# Altium PCB PCB1_Young.PcbDoc
Units mil, origin at the board's own origin, x right, y up, seen from the top; angles counter-clockwise.
Board outline 2800 x 2665 mil, 2 copper layers (Top Layer, Bottom Layer); 26 components, 20 nets, 104 pads, 0 vias.
Unrouted connection lines stored in the file: 9.
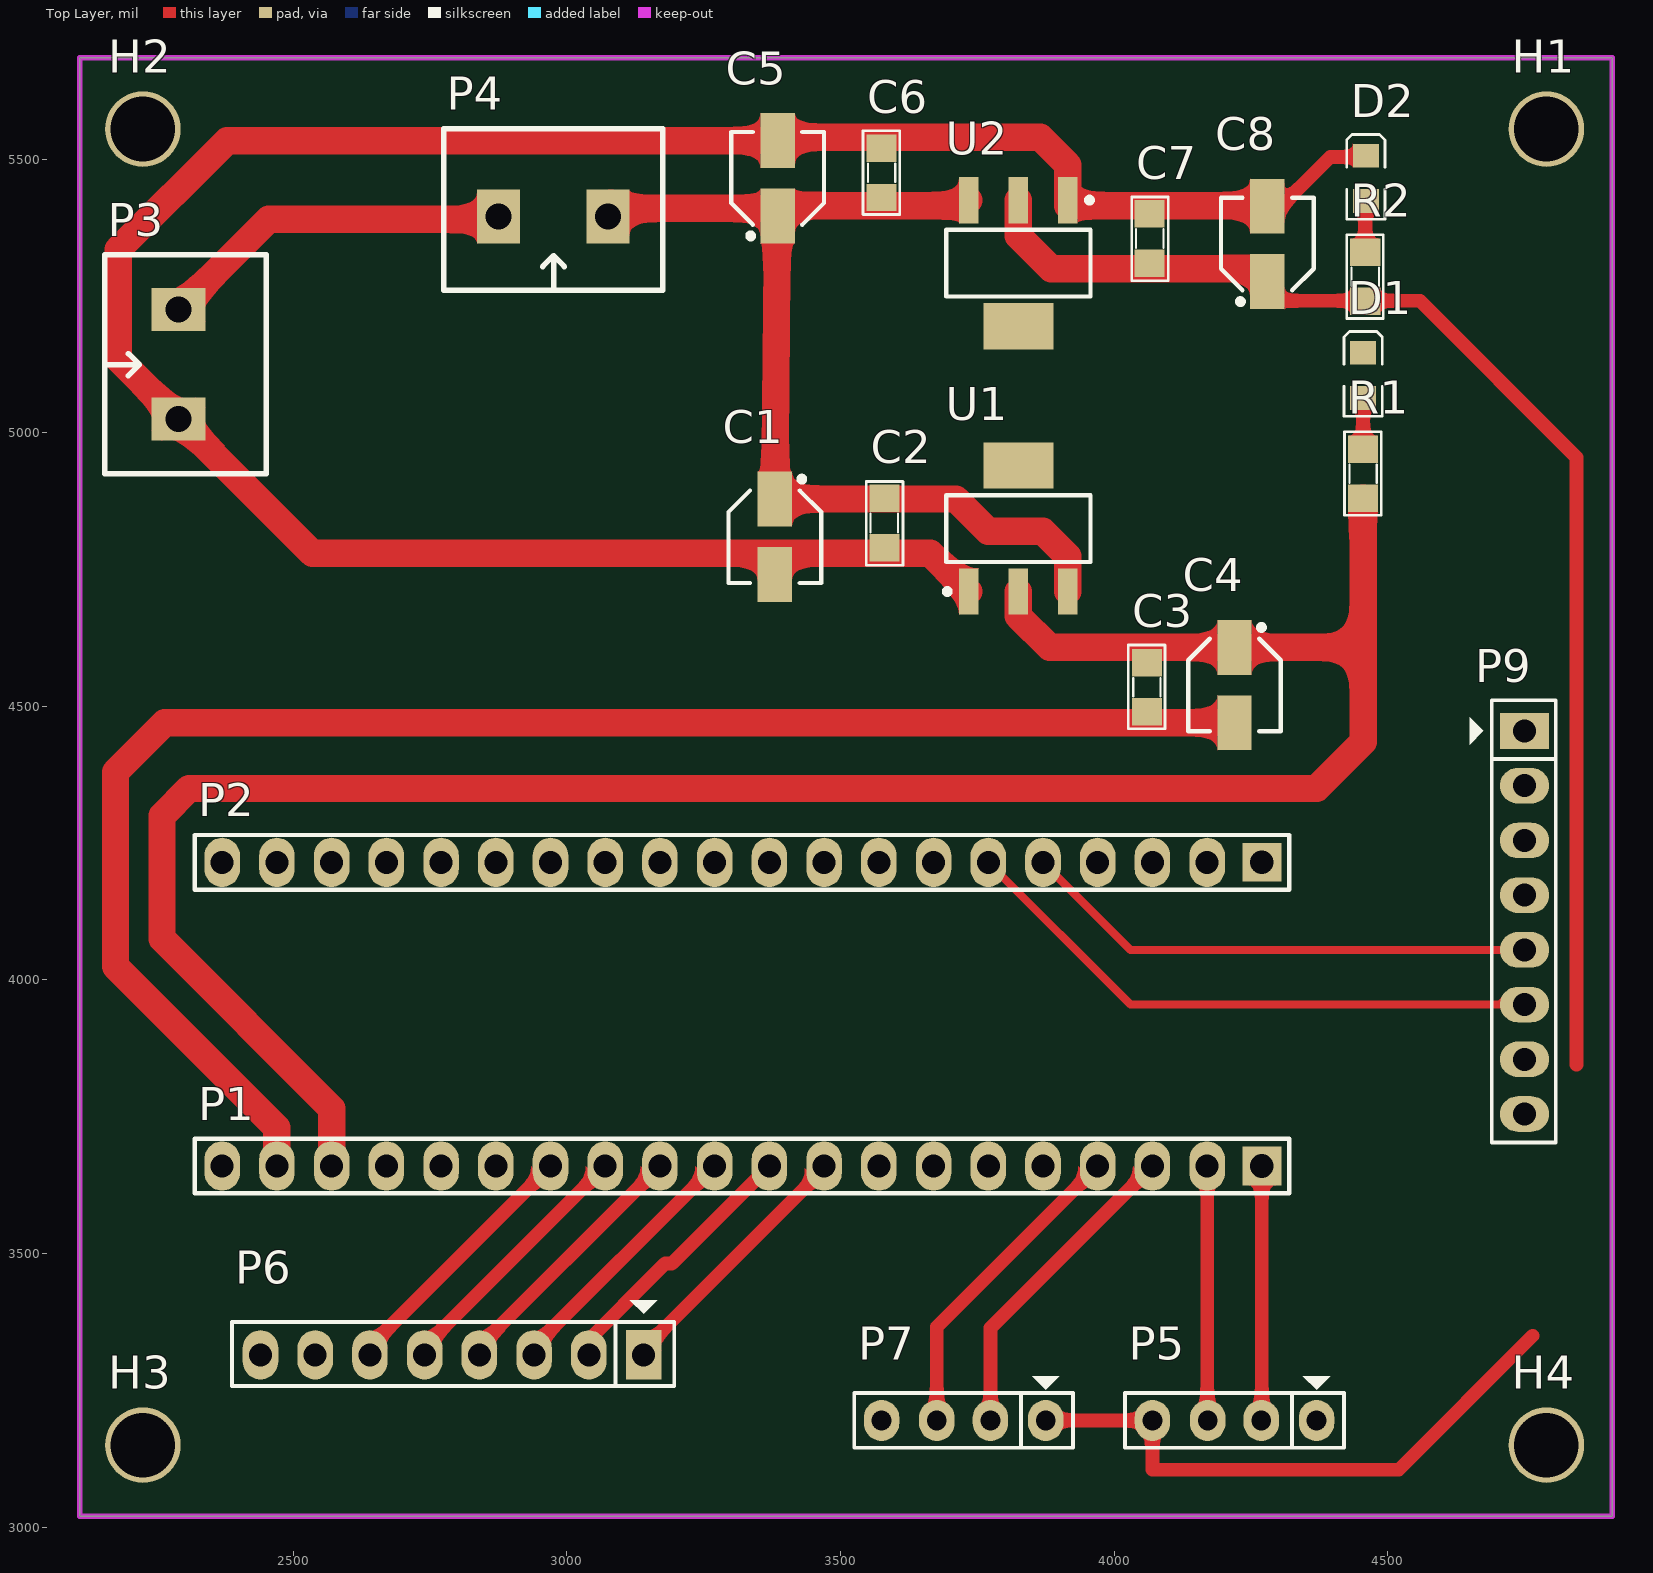
[diagram p0: Top Layer view]
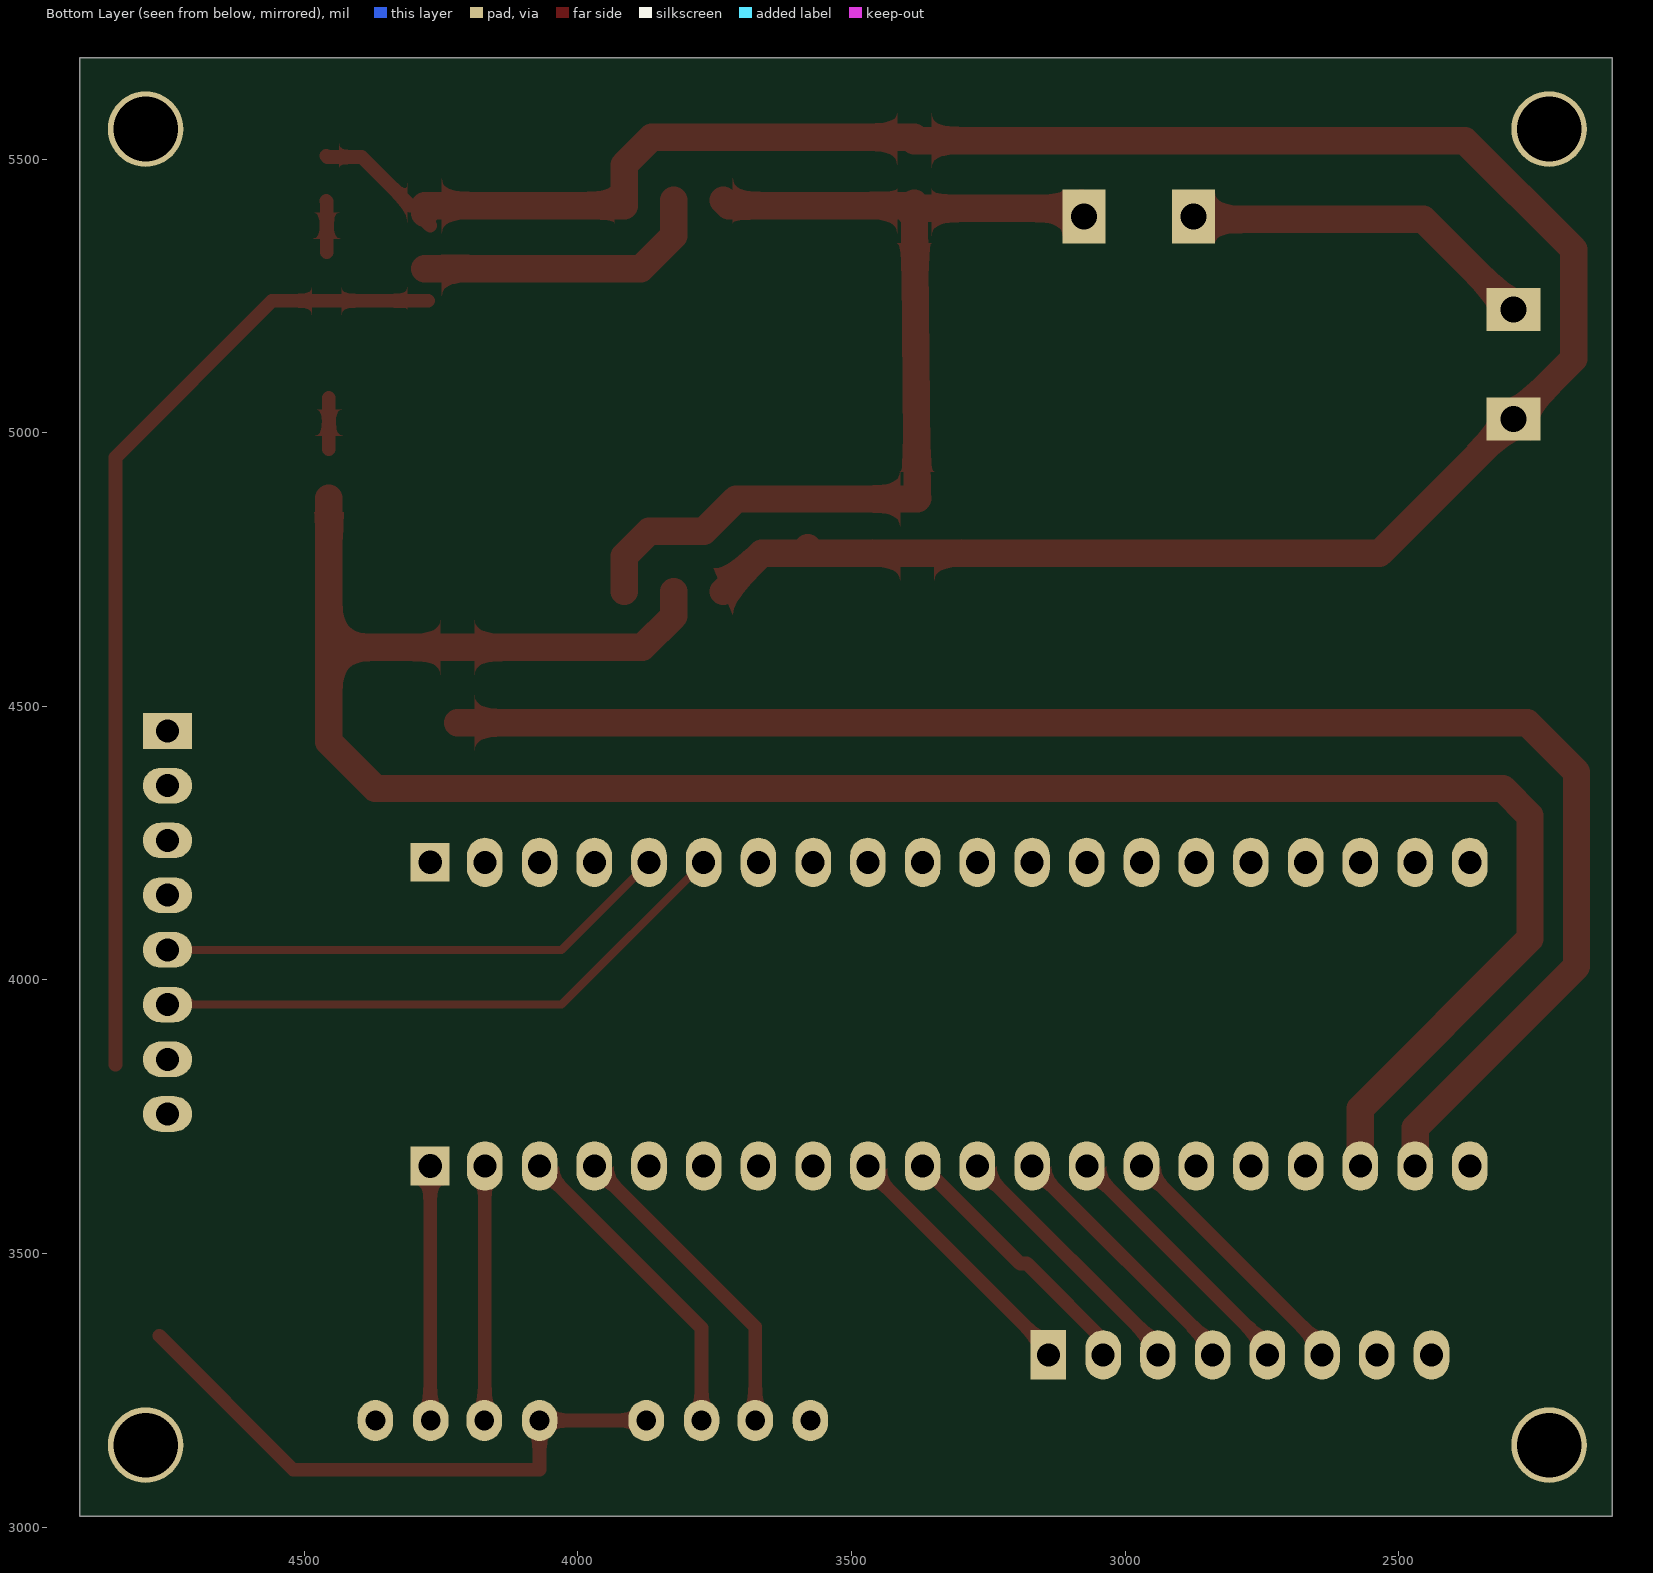
[diagram p1: Bottom Layer view, seen from below]
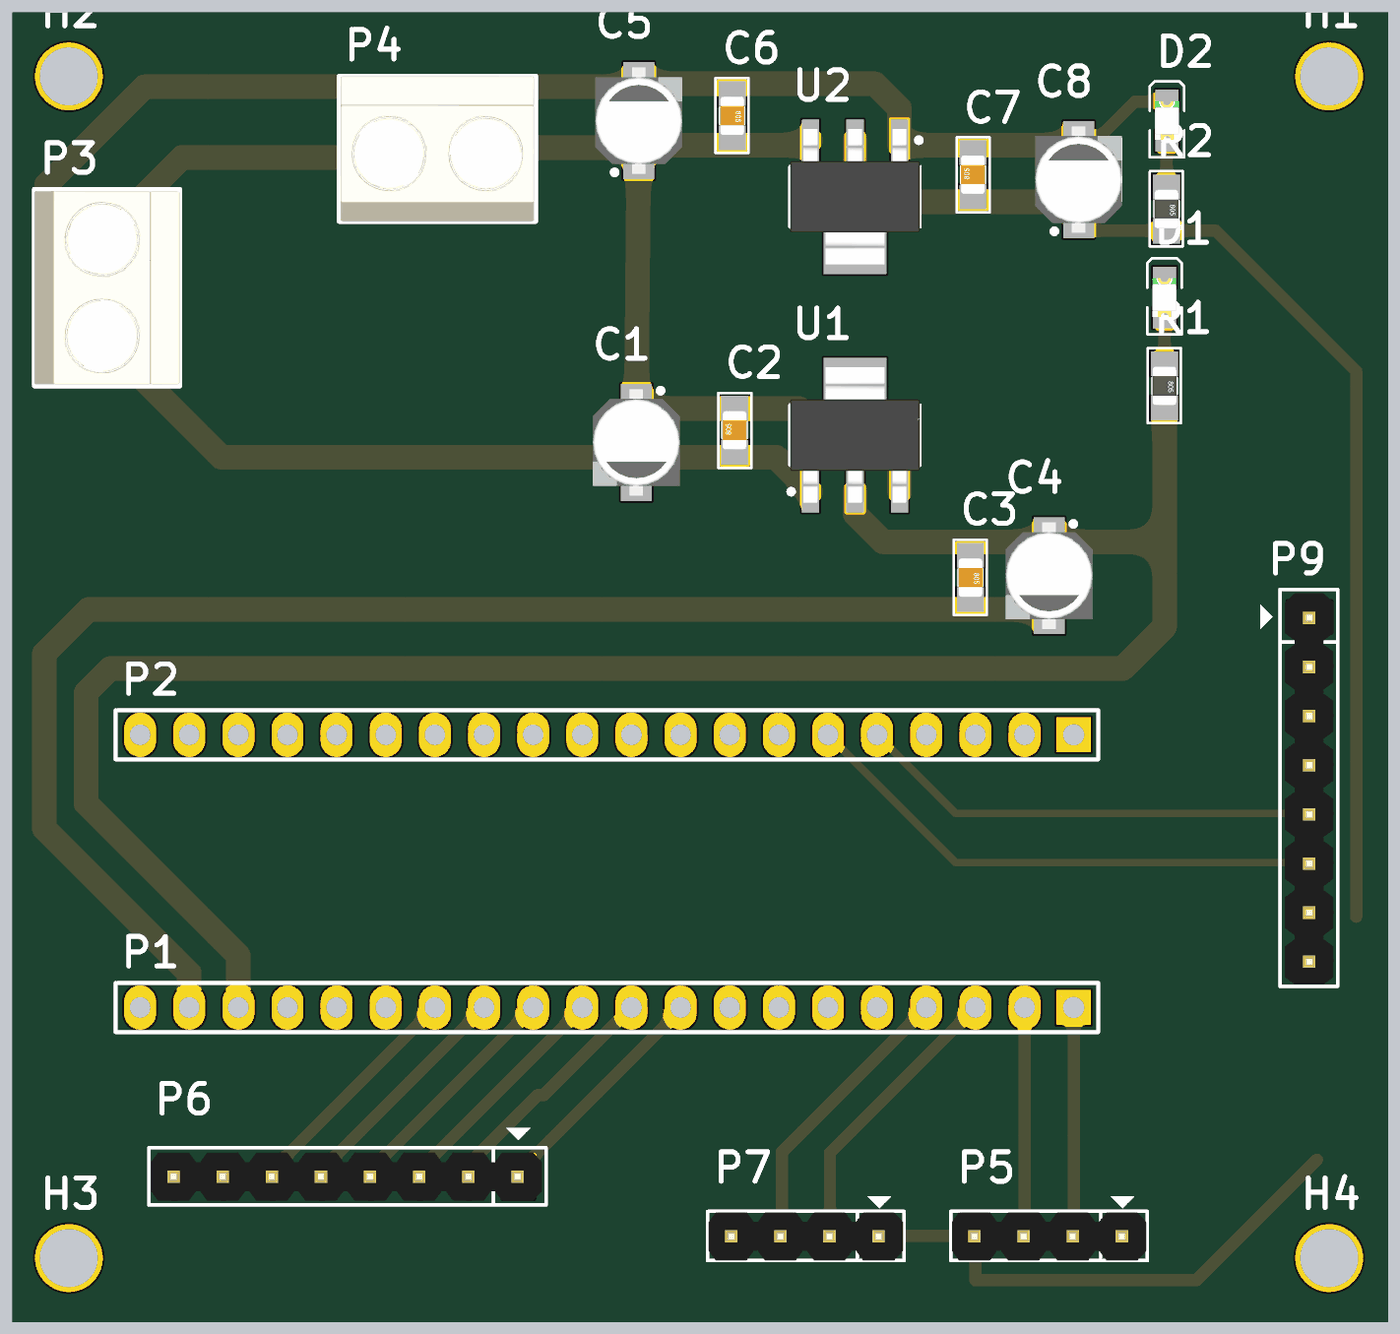
[diagram p2: 3D render of the assembled board from above, using the file's embedded part models]

## Layer stack, top to bottom
Top Solder: solder mask 0.4, Solder Resist, Dk 3.5
Top Layer: signal copper 1.4
Dielectric 1: dielectric 12.6, FR-4, Dk 4.8
Bottom Layer: signal copper 1.4
Bottom Solder: solder mask 0.4, Solder Resist, Dk 3.5

## Board outline
2110,3020 2110,5685 4910,5685 4910,3020

## Design rules (kind name [scope] priority, off if disabled: settings)
Clearance [All] p1: gap=20
DiffPairsRouting [All] p1: maxlimit=10 minlimit=10 mostfreqgap=10 toplayer_minwidth=15 toplayer_maxwidth=15 toplayer_prefwidth=15 bottomlayer_minwidth=15 bottomlayer_maxwidth=15 bottomlayer_prefwidth=15 maxuncoupledlength=500
MinimumSolderMaskSliver [All] p1: minsoldermaskwidth=0
PolygonConnect [All] p1: connectstyle=Relief reliefconductorwidth=10 reliefentries=4 polygonreliefangle="90 Angle" airgapwidth=10
RoutingVias [All] p1: holewidth=19.68 width=39.37 viastyle="Through Hole" minholewidth=19.68 minwidth=39.37 maxholewidth=39.37 maxwidth=78.74
SilkToSilkClearance [All] p1: silktosilkclearance=0
SilkToSolderMaskClearance [IsPad] p1: minsilkscreentomaskgap=0 clearancetoexposedcopper=TRUE
SolderMaskExpansion [All] p1: expansion=4
Width [All] p1: maxlimit=50 minlimit=10 preferedwidth=25
26 further rules are at their usual default settings.

## Classes and differential pairs
differential pair S: +S_P -S_N

## Components (designator, comment, footprint, x,y, rotation, side; value= is the part's Value field where it differs from the comment)
C1 "Cap Pol SMD" "CAP ALU SIZE B" 3380,4810 r270 top
C2 "Cap Non-Pol SMD" CAP-SM-0805 3580,4790 r90 top
C3 "Cap Non-Pol SMD" CAP-SM-0805 4060,4580 r270 top
C4 "Cap Pol SMD" "CAP ALU SIZE B" 4220,4538.9 r270 top
C5 "Cap Pol SMD" "CAP ALU SIZE B" 3385,5465 r90 top
C6 "Cap Non-Pol SMD" CAP-SM-0805 3575,5520 r270 top
C7 "Cap Non-Pol SMD" CAP-SM-0805 4065,5310 r90 top
C8 "Cap Pol SMD" "CAP ALU SIZE B" 4280,5345 r90 top
D1 "LED SMD" LED_0805_Blue 4455,5105 r90 top
D2 "LED SMD" LED_0805_Blue 4460,5465 r90 top
H1 "Hole" "LO KHOAN 3MM" 4790,5555 r0 top
H2 "Hole" "LO KHOAN 3MM" 2225,5555 r0 top
H3 "Hole" "LO KHOAN 3MM" 2225,3150 r0 top
H4 "Hole" "LO KHOAN 3MM" 4790,3150 r0 top
P1 "Header 21-40" HDR1X20 4270,3660 r180 top
P2 "Header 1-20" HDR1X20 4270,4215 r180 top
P3 "Domino 2" "DOMINO 2- 5mm" 2290,5125 r90 top
P4 "Domino 2" "DOMINO 2- 5mm" 2975,5395 r180 top
P5 "Header 4" JP4 4270,3195 r180 top
P6 "Header 8" JP8 3140,3315 r180 top
P7 "Header 4" JP4 3775,3195 r180 top
P9 "Header 8" JP8 4750,4455 r270 top
R1 "RESISTOR SMD" RES-SM-0805 4455,4970 r270 top
R2 "RESISTOR SMD" RES-SM-0805 4459,5330 r270 top
U1 "AMS1117-5" SOT230P700X180-4N 3825,4825 r90 top
U2 "AMS1117-3.3" SOT230P700X180-4N 3825,5310 r270 top

## Footprints (in the part's own frame and the unit in brackets; to place one, negate y for a bottom-side part, rotate by r counter-clockwise, add the part's x,y. Pads: shape width x height; smd on the part's side, far side on the other; paste and mask are expansions set on the pad)
"CAP ALU SIZE B" [mm] "Capacitor, Aluminium Electrolytric, 4.3mm L X 4.3mm W X 5.4mm H, IPC Medium Density"
  rect 2.55x1.6 smd: 1(-1.75,0) 2(1.75,0)
  silkscreen extent -2.8,-2.15 2.15,2.15, body extent -2.75,-2.25 2.75,2.25, height 5.7
CAP-SM-0805 [mil]
  rect 50x55 smd: 1(0,0) 2(90,0)
  silkscreen extent -32,-34 121,33, body extent 6,-25 84,25, height 31
"DOMINO 2- 5mm" [mm]
  rect 2x2.5 hole 1.2: 1(-2.54,0) 2(2.54,0)
  silkscreen extent -5.08,-4.08 5.08,3.43, body extent -5,-4.07 5,3.43, height 10
HDR1X20 [mil] "Connector; Header; 20 Position"
  rect 70.87x70.87 hole 43.31: 1(0,0)
  oval 65x90 hole 42: 2(100,0) 3(200,0) 4(300,0) 5(400,0) 6(500,0) 7(600,0) 8(700,0) 9(800,0) 10(900,0) 11(1000,0) 12(1100,0) 13(1200,0) 14(1300,0) 15(1400,0) 16(1500,0) 17(1600,0) 18(1700,0) 19(1800,0) 20(1900,0)
  silkscreen extent -50,-50 1950,50
JP4 [mil] "Jumper 4"
  oval 65x75 hole 36: 1(-100,0) 2(1,0) 3(99,0) 4(200,0)
  silkscreen extent -150,-81 250,50, body extent -148,-48 248,50, height 323
JP8 [mil] "JP8"
  rect 65x90 hole 42: 1(0,0)
  oval 65x90 hole 42: 2(100,0) 3(200,0) 4(300,0) 5(400,0) 6(500,0) 7(600,0) 8(700,0)
  silkscreen extent -56,-100 752,57, body extent -48,-50 748,48, height 323
LED_0805_Blue [mm] "Chip LED, 2-Leads, Body 2.0x1.3mm, IPC Medium Density"
  rect 1.1x1.2 smd: 1(-1.05,0) 2(1.05,0)
  silkscreen extent -1.91,-0.89 2.03,0.89, body extent -1,-0.63 1,0.62, height 0.68
"LO KHOAN 3MM" [mil]
  round 138 hole 118.1: 1(0,0)
RES-SM-0805 [mil]
  rect 50x55 smd: 1(0,0) 2(90,0)
  silkscreen extent -32,-34 121,33, body extent 6,-25 84,25, height 31
SOT230P700X180-4N [mm] "SOT223, 4-Leads, Body 6.50x7.00mm (avg), Pitch 2.30mm, IPC Medium Density"
  rect 2.15x0.9 smd: 1(-2.925,2.3) 2(-2.925,0) 3(-2.925,-2.3)
  rect 2.15x3.25 smd: 4(2.925,0)
  silkscreen extent -3.05,-3.35 1.55,3.42, body extent -3.5,-3.35 3.5,3.35, height 1.8

## Part data
C1 C4 C5 C8: "Polarized Capacitor (Radial)"
C2 C3 C6 C7: "Capacitor"
D1 D2: "LED"
H1 H2 H3 H4: "Hole 3mm"
P1 P2: library part "Header 20", "Header, 20-Pin"
P3 P4: "Domino, 2-Pin"
P5 P7: "Header, 4-Pin"
P6 P9: "Header, 8-Pin"
R1 R2: "Resistor"
U1: library part AMS1117-3.3

## Nets (pads, with @x,y where several pads share a name; then routed paths per layer and width w, separated by ;. In a path a pad name is that pad's centre, name@x,y a point inside that pad or via, vN(x,y) a via of type N, cw(c..) or ccw(c..) an arc to the next point about the centre after c; other vN are vias at no path point)
1_IN1: P1.9 P6.1 | length 485.8
  Top Layer w25: P6.1@3130,3315 3470,3655 P1.9
1_IN2: P1.10 P6.2 | length 482.5
  Top Layer w25: P6.2@3025.22,3327.5 3179.45,3481.73 3191.73,3481.73 P1.10
1_IN3: P1.11 P6.3 | length 480.8
  Top Layer w25: P6.3@2930,3320 P1.11
1_IN4: P1.12 P6.4 | length 491.4
  Top Layer w25: P6.4@2822.5,3312.5 P1.12
3.3: C7.1 C8.1 P5.4 P7.1 P9.8 R2.2 U2.2 | length 3426.1
  Top Layer w25: P7.1 P5.4 4070,3105 4520,3105 4765,3350 ; C8.1@4273.9,5241.1 4558.9,5241.1 4845,4955 4845,3845
  Top Layer w50: U2.2 3825,5360 3885,5300 C8.1@4280,5300
5V: C3.1 C4.1 P1.18 R1.2 U1.2 | length 4162.9
  Top Layer w50: P1.18 2570,3765 2260,4075 2260,4300 2310,4350 4370,4350 4455,4435 4455,4607.8 ; U1.2 3825,4665 3882.2,4607.8 C4.1 4455,4607.8 ; R1.2 4455,4607.8
CA1: P1.1 P5.2 | length 465.4
  Top Layer w25: P5.2 4270,3196 P1.1
CA2: P1.3 P7.2 | length 587.6
  Top Layer w25: P7.2 3774,3364 P1.3
CB1: P1.2 P5.3 | length 465.4
  Top Layer w25: P1.2 4170,3196 P5.3
CB2: P1.4 P7.3 | length 586.8
  Top Layer w25: P7.3 3676,3366 P1.4
GND: C1.2 C2.1 C3.2 C4.2 C5.2 C6.1 C7.2 C8.2 D1.2 D2.2 P1.19 P2.1 P2.2 P3.1 P5.1 P7.4 P9.7 U1.1 U2.1 | length 7384
  Top Layer w25: C8.2@4270,5378.9 4286.1,5395 C8.2@4280,5401.1 ; C8.2@4306.1,5415 4395,5503.9 4457.56,5503.9 D2.2
  Top Layer w50: P1.19 2470,3730 2175,4025 2175,4380 2265,4470 C4.2 ; C5.2 2378.9,5533.9 2180,5335 2180,5135 P3.1 2535,4780 C2.1@3570,4780 ; C5.2@3385,5540 3865,5540 3915.55,5489.45 U2.1 3915.55,5415 4280,5415 C8.2 C8.2@4280,5401.1 ; C2.1 C2.1@3570,4780 ; U1.1 3664.29,4780 C2.1@3570,4780
NetC1_1: C1.1 C2.2 C5.1 C6.2 P4.1 U1.3 U2.3 | length 1872.2
  Top Layer w50: P4.1@3080,5420 3090,5410 3384.56,5410 3383.95,5396.15 3383.9,5395 C5.1@3384.78,5395.88 ; C5.1@3385,5420 3384.78,5396.1 C5.1@3384.78,5395.88 ; U2.3 3724.29,5415 3403.9,5415 C5.1 C5.1@3384.78,5395.88 ; U1.3 3915.55,4774.45 3870,4820 3770,4820 3711.1,4878.9 C1.1 3378.9,4880 3380,4881.1 C5.1@3384.78,5395.88
NetD1_1: D1.1 R1.1 | length 93.7
  Top Layer w25: R1.1 D1.1
NetD2_1: D2.1 R2.1 | length 94.1
  Top Layer w25: R2.1 4459,5422.66 D2.1
NetP3_2: P3.2 P4.2 | length 655.4
  Top Layer w50: P3.2 2455,5390 2870,5390 P4.2
PWM1: P1.13 P6.5 | length 484.4
  Top Layer w25: P6.5@2727.5,3317.5 P1.13
PWM2: P1.14 P6.6 | length 484.4
  Top Layer w25: P6.6@2627.5,3317.5 P1.14
S_N: P2.5 P9.5 | length 921.3
  Top Layer w15: P2.5 4030,4055 P9.5@4725,4055
S_P: P2.6 P9.6 | length 1056.8
  Top Layer w15: P2.6 4030,3955 4705,3955 P9.6@4715,3965
VB: P2.20
pads on no net: H1.1 H2.1 H3.1 H4.1 P1.5 P1.6 P1.7 P1.8 P1.15 P1.16 P1.17 P1.20 P2.3 P2.4 P2.7 P2.8 P2.9 P2.10 P2.11 P2.12 P2.13 P2.14 P2.15 P2.16 P2.17 P2.18 P2.19 P6.7 P6.8 P9.1 P9.2 P9.3 P9.4 U1.4 U2.4

## Keep-outs
Top Layer:
  the board outline again, w10